# Altium PCB ControllerBoard.PcbDoc
Units mm, origin at the board's own origin, x right, y up, seen from the top; angles counter-clockwise.
Board outline 60 x 110 mm, 2 copper layers (Top Layer, Bottom Layer); 86 components, 64 nets, 332 pads, 139 vias.
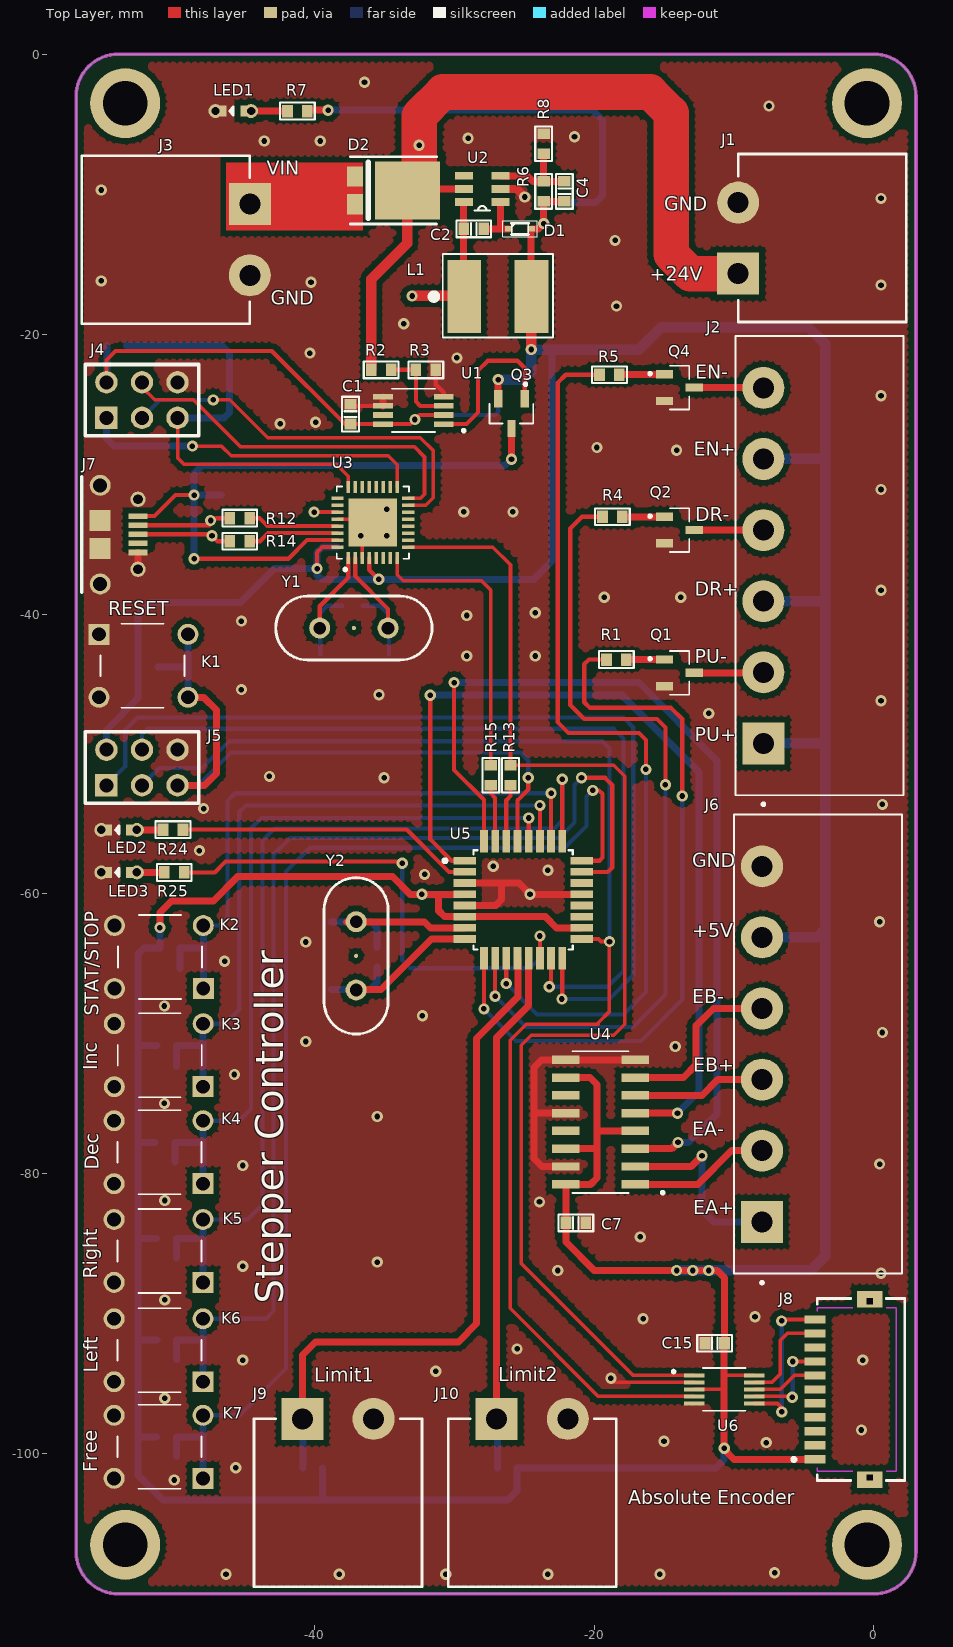
[diagram p0: Top Layer view]
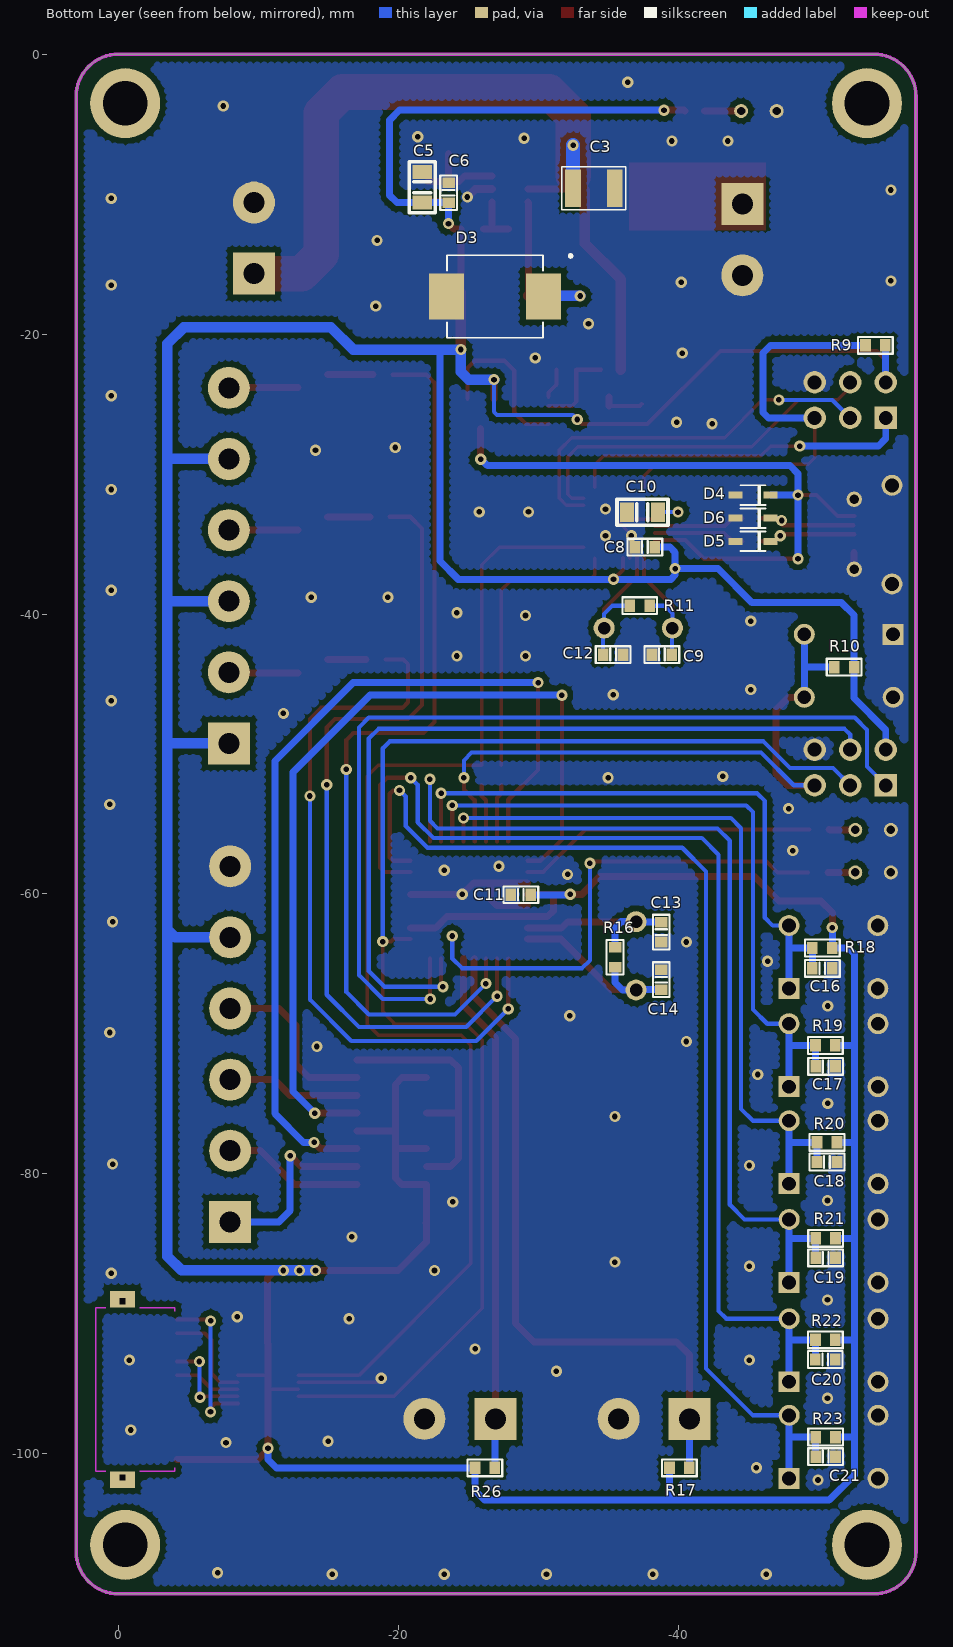
[diagram p1: Bottom Layer view, seen from below]
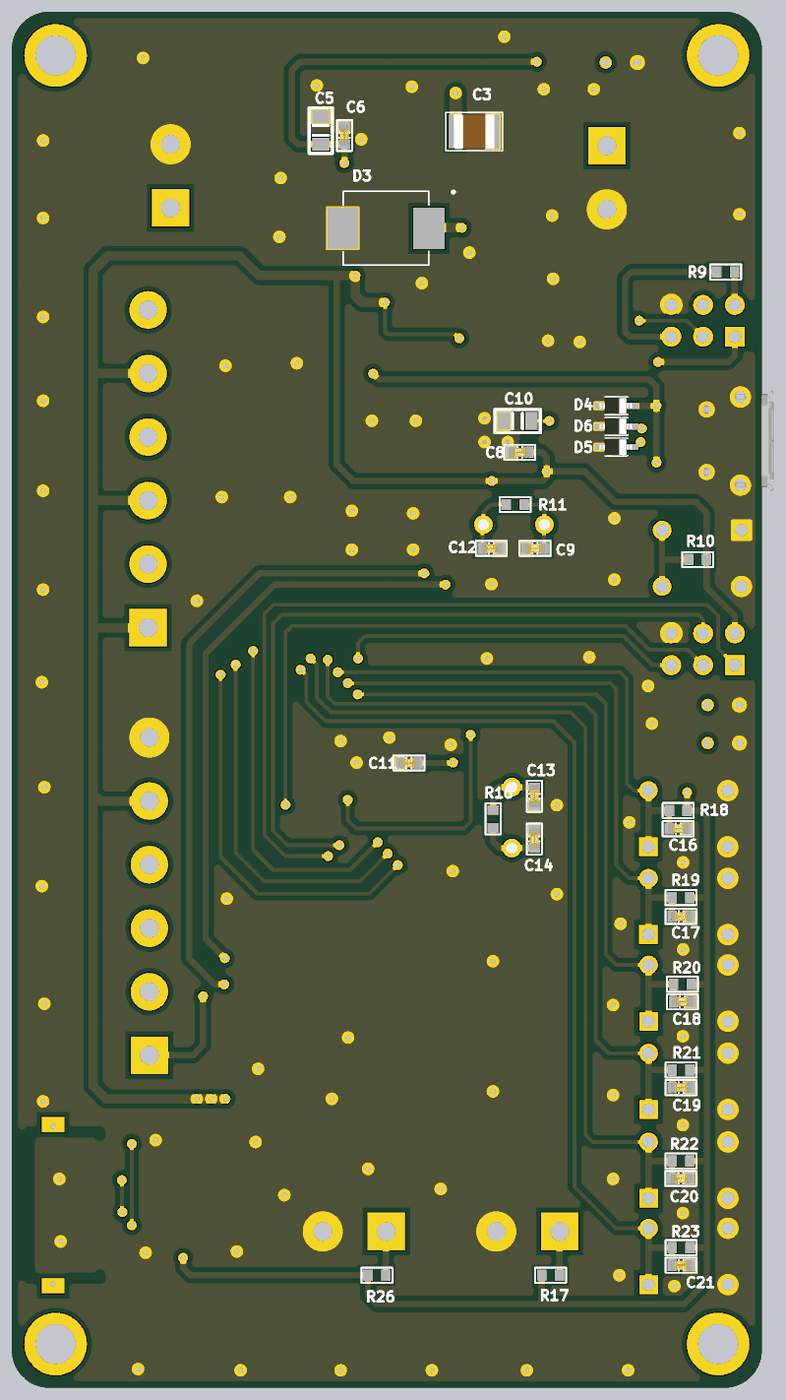
[diagram p2: 3D render of the assembled board from below, using the file's embedded part models]

## Layer stack, top to bottom
Top Solder: solder mask 0.0102, Solder Resist, Dk 3.5
Top Layer: signal copper 0.0356
Dielectric 1: dielectric 0.32, FR-4, Dk 4.8
Bottom Layer: signal copper 0.0356
Bottom Solder: solder mask 0.0102, Solder Resist, Dk 3.5

## Board outline
-57,-107 -57,-3 cw(c-54,-3) -54,0 0,0 cw(c0,-3) 3,-3 3,-107 cw(c0,-107) 0,-110 -54,-110 cw(c-54,-107)

## Design rules (kind name [scope] priority, off if disabled: settings)
Clearance [All] p1: gap=0.4 except(0.2: Arc-Arc Arc-Track Arc-SMDPad Arc-THPad Arc-Via Track-Track Track-SMDPad Track-THPad Track-Via SMDPad-SMDPad SMDPad-THPad SMDPad-Via THPad-THPad THPad-Via Via-Via; 0.35: Region-Region)
HoleSize [All] p1: absolutevalues=TRUE maxlimit=10 minlimit=0.025 maxpercent=80.000 minpercent=20.000
PolygonConnect [All] p1: connectstyle=Direct reliefconductorwidth=0.254 reliefentries=4 polygonreliefangle="90 Angle" airgapwidth=0.254
RoutingVias [All] p1: holewidth=0.3 width=0.6 viastyle="Through Hole" minholewidth=0.3 minwidth=0.6 maxholewidth=0.3 maxwidth=0.6
SolderMaskExpansion [All] p1: expansion=0.102
Width [All] p1: maxlimit=5 minlimit=0.254 preferedwidth=0.4
29 further rules are at their usual default settings.

## Components (designator, comment, footprint, x,y, rotation, side; value= is the part's Value field where it differs from the comment)
C1 "0.1uF" SMD_C(0603) -37.403,-25.714 r90 top
C2 "0.1uF" SMD_C(0603) -28.601,-12.475 r180 top
C3 "10uF" C1210 -33.989,-9.448 r0 bottom
C4 "22pF" SMD_C(0603) -22.12,-9.8 r90 top
C5 "22uF" SMD_C(0805) -21.72,-9.5 r90 bottom
C6 "0.1uF" SMD_C(0603) -23.61,-9.893 r90 bottom
C7 "0.1uF" SMD_C(0603) -21.3,-83.5 r0 top
C8 "0.1uF" SMD_C(0603) -37.634,-35.215 r0 bottom
C9 "22pF" SMD_C(0603) -38.849,-42.9 r180 bottom
C10 "1uF" SMD_C(0805) -37.46,-32.715 r0 bottom
C11 "0.1uF" SMD_C(0603) -28.77,-60.055 r0 bottom
C12 "22pF" SMD_C(0603) -35.36,-42.9 r0 bottom
C13 "22pF" SMD_C(0603) -38.8,-62.72 r90 bottom
C14 "22pF" SMD_C(0603) -38.8,-66.12 r270 bottom
C15 "0.1uF" SMD_C(0603) -11.389,-92.1 r180 top
C16 "0.1uF" SMD_C(0603) -50.311,-65.31 r180 bottom
C17 "0.1uF" SMD_C(0603) -50.541,-72.32 r180 bottom
C18 "0.1uF" SMD_C(0603) -50.641,-79.15 r180 bottom
C19 "0.1uF" SMD_C(0603) -50.541,-86 r180 bottom
C20 "0.1uF" SMD_C(0603) -50.519,-93.26 r180 bottom
C21 "0.1uF" SMD_C(0603) -50.541,-100.2 r180 bottom
D1 "1N4148" SODFL1608X70N -25.29,-12.475 r0 top
D2 "FSV8100V" TO-277 -34.34,-9.73 r0 top
D3 "B3100-13-F" DIO_B340-13-F -26.923,-17.315 r180 bottom
D4 "DF2B7AFS,L3M" SOD323 -45.36,-31.5 r0 bottom
D5 "DF2B7AFS,L3M" SOD323 -45.36,-34.8 r0 bottom
D6 "DF2B7AFS,L3M" SOD323 -45.36,-33.15 r0 bottom
J1 "CIM025P5" CON2_P5.08_CIM025P5 -9.7,-13.14 r270 top
J2 "796638-6" TE_3-796638-6 -7.9,-49.24 r90 top
J3 "CIM025P5" CON2_P5.08_CIM025P5 -44.6,-13.26 r90 top
J4 "6pin" Header-2.54m-6pin_1 -54.84,-25.98 r90 top
J5 "6pin" Header-2.54m-6pin_1 -54.84,-52.234 r90 top
J6 "796638-6" TE_3-796638-6 -8,-83.42 r90 top
J7 "10118194-0001LF" 10118194-0001LF -53.936,-34.325 r90 top
J8 "Molex 501568-1107" MOLEX_501568-1107 -4.2,-95.4 r90 top
J9 "CIM025P5" CON2_P5.08_CIM025P5 -38.295,-97.5 r180 top
J10 "CIM025P5" CON2_P5.08_CIM025P5 -24.415,-97.5 r180 top
K1 "BUTTON_DIP" "PUSH BUTTON_MINI(4 PIN)" -52.269,-43.696 r0 top
K2 "BUTTON_DIP" "PUSH BUTTON_MINI(4 PIN)" -51.021,-64.51 r180 top
K3 "BUTTON_DIP" "PUSH BUTTON_MINI(4 PIN)" -51.029,-71.52 r180 top
K4 "BUTTON_DIP" "PUSH BUTTON_MINI(4 PIN)" -51.04,-78.45 r180 top
K5 "BUTTON_DIP" "PUSH BUTTON_MINI(4 PIN)" -51.04,-85.5 r180 top
K6 "BUTTON_DIP" "PUSH BUTTON_MINI(4 PIN)" -51.04,-92.6 r180 top
K7 "BUTTON_DIP" "PUSH BUTTON_MINI(4 PIN)" -51.04,-99.5 r180 top
L1 "VLS6045EX-220M-H" VLS6045EX-220M-H_6.3*6mm -26.873,-17.315 r0 top
LED1 "RED" LED0603_1 -45.777,-4.06 r180 top
LED2 "GREEN" LED0603_1 -53.934,-55.42 r180 top
LED3 "RED" LED0603_1 -53.934,-58.46 r180 top
Q1 "MMBT2222ALT1G" SOT23-3 -13.9,-44.2 r0 top
Q2 "MMBT2222ALT1G" SOT23-3 -13.9,-34 r0 top
Q3 "FDN304PZ" SOT23-3 -25.903,-25.68 r270 top
Q4 "MMBT2222ALT1G" SOT23-3 -13.9,-23.82 r0 top
R1 "470R" SMD_R(0603) -18.4,-43.25 r0 top
R2 "20k" SMD_R(0603) -35.211,-22.55 r180 top
R3 "10k" SMD_R(0603) -32.02,-22.55 r0 top
R4 "470R" SMD_R(0603) -18.689,-33.05 r0 top
R5 "470R" SMD_R(0603) -18.9,-22.9 r0 top
R6 "52.3k" SMD_R(0603) -23.6,-9.8 r270 top
R7 "1k" SMD_R(0603) -41.196,-4.06 r180 top
R8 "10k" SMD_R(0603) -23.6,-6.4 r270 top
R9 "10k" SMD_R(0603) -54.1,-20.8 r180 bottom
R10 "10k" SMD_R(0603) -51.869,-43.796 r180 bottom
R11 "1M" SMD_R(0603) -37.26,-39.4 r180 bottom
R12 "22R" SMD_R(0603) -45.31,-33.15 r0 top
R13 "1k" SMD_R(0603) -25.97,-51.522 r270 top
R14 "22R" SMD_R(0603) -45.31,-34.8 r0 top
R15 "1k" SMD_R(0603) -27.37,-51.522 r270 top
R16 "1M" SMD_R(0603) -35.5,-64.52 r90 bottom
R17 "4.7k" SMD_R(0603) -40.1,-101 r180 bottom
R18 "4.7k" SMD_R(0603) -50.311,-63.86 r0 bottom
R19 "4.7k" SMD_R(0603) -50.53,-70.82 r0 bottom
R20 "4.7k" SMD_R(0603) -50.641,-77.75 r0 bottom
R21 "4.7k" SMD_R(0603) -50.541,-84.6 r0 bottom
R22 "4.7k" SMD_R(0603) -50.53,-91.86 r0 bottom
R23 "4.7k" SMD_R(0603) -50.541,-98.8 r0 bottom
R24 "1k" SMD_R(0603) -50.084,-55.4 r180 top
R25 "1k" SMD_R(0603) -49.996,-58.46 r180 top
R26 "4.7k" SMD_R(0603) -26.2,-101 r180 bottom
U1 "LMV358D" MSOP-8N -32.903,-25.45 r180 top
U2 "MCP16331" SOT23-6 -27.99,-9.63 r180 top
U3 "ATMEGA8U2-MU" ATMEGA8_QFN50P500X500X100-33N -35.81,-33.465 r90 top
U4 "MC3468D" SOIC-16N -19.545,-76.295 r180 top
U5 "ATMEGA328PB-AU" Atmega328_QFP80P900X900X120-32N -25.07,-60.422 r0 top
U6 "MAX1486EUB+T" MAX1486_SOP50P490X110-10N -10.7,-95.4 r0 top
Y1 "16MHz" XTAL_DIP -37.16,-41 r0 top
Y2 "16MHz" XTAL_DIP -37,-64.42 r270 top

## Footprints (in the part's own frame and the unit in brackets; to place one, negate y for a bottom-side part, rotate by r counter-clockwise, add the part's x,y. Pads: shape width x height; smd on the part's side, far side on the other; paste and mask are expansions set on the pad)
10118194-0001LF [mm] "CONN USB MICRO B RECPT SMT R/A"
  rect 0.4x1.35 smd: 1(1.325,-1.35) 2(0.675,-1.35) 3(0.025,-1.35) 4(-0.625,-1.35) 5(-1.275,-1.35)
  round 1.5 hole 1: 6(-3.525,1.35) 6(3.525,1.35)
  round 1.1 hole 0.7: 6(-2.475,-1.35) 6(2.525,-1.35)
  rect 1.5x1.5 smd: 6(-0.975,1.35) 6(1.025,1.35)
  silkscreen extent -4.1,2.68 4.13,2.68, body extent -4,-1.55 4.05,4.03, height 2.73
ATMEGA8_QFN50P500X500X100-33N [mm]
  rect 0.86x0.26 smd: 1(-2.535,1.75) 2(-2.535,1.25) 3(-2.535,0.75) 4(-2.535,0.25) 5(-2.535,-0.25) 6(-2.535,-0.75) 7(-2.535,-1.25) 8(-2.535,-1.75) 17(2.535,-1.75) 18(2.535,-1.25) 19(2.535,-0.75) 20(2.535,-0.25) 21(2.535,0.25) 22(2.535,0.75) 23(2.535,1.25) 24(2.535,1.75)
  rect 0.26x0.86 smd: 9(-1.75,-2.535) 10(-1.25,-2.535) 11(-0.75,-2.535) 12(-0.25,-2.535) 13(0.25,-2.535) 14(0.75,-2.535) 15(1.25,-2.535) 16(1.75,-2.535) 25(1.75,2.535) 26(1.25,2.535) 27(0.75,2.535) 28(0.25,2.535) 29(-0.25,2.535) 30(-0.75,2.535) 31(-1.25,2.535) 32(-1.75,2.535)
  rect 3.45x3.45 smd: 33(0,0)
  silkscreen extent -3.45,-2.58 2.58,2.58
Atmega328_QFP80P900X900X120-32N [mm]
  rect 1.6x0.55 smd: 1(-4.18,2.8) 2(-4.18,2) 3(-4.18,1.2) 4(-4.18,0.4) 5(-4.18,-0.4) 6(-4.18,-1.2) 7(-4.18,-2) 8(-4.18,-2.8) 17(4.18,-2.8) 18(4.18,-2) 19(4.18,-1.2) 20(4.18,-0.4) 21(4.18,0.4) 22(4.18,1.2) 23(4.18,2) 24(4.18,2.8)
  rect 0.55x1.6 smd: 9(-2.8,-4.18) 10(-2,-4.18) 11(-1.2,-4.18) 12(-0.4,-4.18) 13(0.4,-4.18) 14(1.2,-4.18) 15(2,-4.18) 16(2.8,-4.18) 25(2.8,4.18) 26(2,4.18) 27(1.2,4.18) 28(0.4,4.18) 29(-0.4,4.18) 30(-1.2,4.18) 31(-2,4.18) 32(-2.8,4.18)
  silkscreen extent -5.71,-3.55 3.55,3.55
C1210 [mil]
  rect 44x106 smd: 1(-59,5) 2(59,5)
  silkscreen extent -90,-55 90,65, body extent -65,-50 65,60, height 99
CON2_P5.08_CIM025P5 [mm]
  rect 3x3 hole 1.5: 1(2.54,0)
  round 3 hole 1.5: 2(-2.54,0)
  silkscreen extent -6,0 6,12
DIO_B340-13-F [mm]
  rect 2.5x3.3 smd: A(-3.45,0) C(3.45,0)
  silkscreen extent -3.42,-2.95 5.5,3
Header-2.54m-6pin_1 [mm]
  rect 1.6x1.6 hole 1: 1(0,0)
  round 1.6 hole 1: 2(2.54,0) 3(0,-2.54) 4(2.54,-2.54) 5(0,-5.08) 6(2.54,-5.08)
  silkscreen extent -1.27,-6.6 3.81,1.52
LED0603_1 [mm]
  round 1 hole 0.6: 1(-1.27,0) 2(1.27,0)
  rect 0.5x0.8 smd: 1(-0.75,0) 2(0.75,0)
  silkscreen extent 0,-0.3 0.25,0.3, body extent -0.85,-0.45 0.85,0.45, height 0.9
MAX1486_SOP50P490X110-10N [mm]
  rect 1.47x0.28 smd: 1(-2.15,1) 2(-2.15,0.5) 3(-2.15,0) 4(-2.15,-0.5) 5(-2.15,-1) 6(2.15,-1) 7(2.15,-0.5) 8(2.15,0) 9(2.15,0.5) 10(2.15,1)
  silkscreen extent -3.72,-1.53 1.53,1.53
MOLEX_501568-1107 [mm]
  rect 1.2x1.8 hole 0.4 square copper offset -0.15,0: 0(-6.3,-3.9)
  rect 1.2x1.8 hole 0.4 square copper offset 0.15,0: 0(6.3,-3.9)
  rect 0.6x1.5 smd: 1(-5,0) 2(-4,0) 3(-3,0) 4(-2,0) 5(-1,0) 6(0,0) 7(1,0) 8(2,0) 9(3,0) 10(4,0) 11(5,0)
  Keep-Out Layer lines w0.1: -5.588,-0.15 -5.85,-0.15 -5.85,-2.667 ; 5.588,-0.15 5.85,-0.15 5.85,-2.667 ; -5.85,-5.08 -5.85,-5.8 5.85,-5.8 5.85,-5.08
  silkscreen extent -6.5,-6.4 6.5,1.62
MSOP-8N [mm]
  rect 1.42x0.4 smd: 1(-2.165,0.975) 2(-2.165,0.325) 3(-2.165,-0.325) 4(-2.165,-0.975) 5(2.165,-0.975) 6(2.165,-0.325) 7(2.165,0.325) 8(2.165,0.975)
  silkscreen extent -3.69,-1.55 1.55,1.55
"PUSH BUTTON_MINI(4 PIN)" [mm]
  rect 1.498x1.498 hole 0.99: 1(-3.1,2.25)
  round 1.498 hole 0.99: 1(-3.1,-2.25) 2(3.25,-2.25) 2(3.25,2.25)
  silkscreen extent -3,-3 3,3
SMD_C(0603) [mil]
  rect 30x35 smd mask+2: 1(-28,0) 2(28,0)
  silkscreen extent -49,-24 49,24, body extent -31,-16 32,16, height 31
SMD_C(0805) [mm]
  rect 1x1.4 smd: 1(-1.1,0) 2(1.1,0)
  silkscreen extent -1.82,-0.92 1.82,0.94, body extent -1.38,-0.58 1.32,0.61, height 0.6
SMD_R(0603) [mil]
  rect 30x35 smd mask+2: 1(-28,0) 2(28,0)
  silkscreen extent -49,-24 49,24, body extent -35,-14 35,13, height 24
SOD323 [mm]
  rect 1x0.5 smd: 1(-1.25,0) 2(1.25,0)
  silkscreen extent -0.9,-0.7 0.9,0.7, body extent -1.25,-0.68 1.35,0.67, height 1.1
SODFL1608X70N [mm]
  rect 0.54x0.42 smd: 1(-0.8,0) 2(0.8,0)
  silkscreen extent -1.22,-0.58 1.22,0.58, body extent -0.8,-0.4 0.8,0.4, height 0.7
SOIC-16N [mm]
  rect 1.97x0.6 smd: 1(-2.475,4.445) 2(-2.475,3.175) 3(-2.475,1.905) 4(-2.475,0.635) 5(-2.475,-0.635) 6(-2.475,-1.905) 7(-2.475,-3.175) 8(-2.475,-4.445) 9(2.475,-4.445) 10(2.475,-3.175) 11(2.475,-1.905) 12(2.475,-0.635) 13(2.475,0.635) 14(2.475,1.905) 15(2.475,3.175) 16(2.475,4.445)
  silkscreen extent -4.54,-5.06 2,5.14
SOT23-3 [mm]
  rect 1.23x0.59 smd: 1(-1.06,0.95) 2(-1.06,-0.95) 3(1.06,0)
  silkscreen extent -2.2,-1.56 0.7,1.56
SOT23-6 [mil]
  rect 50x22 smd: 1(-51,37) 2(-51,0) 3(-51,-37) 4(51,-37) 5(51,0) 6(51,37)
  silkscreen extent -21,48 21,60
TE_3-796638-6 [mm]
  rect 3x3 hole 1.5: 1(0,0)
  round 3 hole 1.5: 2(5.08,0) 3(10.16,0) 4(15.24,0) 5(20.32,0) 6(25.4,0)
  silkscreen extent -4.45,-10 29.1,2
TO-277 [mm]
  rect 1.15x1.45 smd: 1(-2.75,-0.985) 1(-2.75,0.985)
  rect 4.65x4.15 smd: 2(1,0)
  silkscreen extent -3.07,-2.4 3.08,2.4, body extent -3.35,-2.38 3.3,2.37, height 1.2
VLS6045EX-220M-H_6.3*6mm [mm]
  rect 2.4x5.2 smd: 1(-2.4,0) 2(2.4,0)
  silkscreen extent -4.77,-2.92 3.94,3.05
XTAL_DIP [mm]
  round 1.5 hole 0.9: 1(-2.44,0) 2(2.44,0)
  round 0.3 smd: ""(0,0)
  silkscreen extent -5.59,-2.29 5.59,2.29, body extent -5.68,-2.29 5.68,2.36, height 3.5

## Part data
C1 C2 C4 C5 C6 C7 C8 C10 C11 C15: library part Cap, "CAP CER 0.1UF 50V X7R 0603"
C3: library part Cap, "CAP CER 2.2UF 100V X7R 1210"
C9 C12 C13 C14: library part Cap, "CAP CER 27PF 50V C0G/NP0 0603"
C16 C17 C18 C19 C20 C21: library part Cap, "Capacitor"
D1: library part Diode, "Diode"
D2: library part PDS760Q-13, "DIODE SCHOTTKY 100V 8A TO-277"
D3: library part "Diode 10TQ035", "Schottky Rectifier"
D4 D5 D6: "BIDIRECTIONAL ESD DIODE VRWM=+/-"
J1 J3: library part "Header 2", "TERM BLK 2P SIDE ENT 5.08MM PCB"
J2 J6: library part 6PinConnector, "3PinConnector"
J4 J5: library part 6PinConnector_1
J7: "CONN RCPT USB2.0 MICRO B SMD R/A"
J8: library part "11Pin Connector", "3PinConnector"
J9 J10: library part "End Stop Switch", "End Stop Switch"
K1 K2 K3 K4 K5 K6 K7: library part SW-PB, "2 Pin Mini Push Button Switch"
L1: library part Inductor, "Inductor"
LED1 LED2: library part LED_0402, "LED YELLOW CLEAR CHIP SMD"
LED3: library part LED_0402, "LED RED CLEAR 2SMD"
Q1 Q2 Q4: library part NPN, "NPN Bipolar Transistor"
Q3: library part MOSFET-P, "P-Channel MOSFET"
R1 R2 R3 R4 R5 R6 R7 R8 R9 R10 R11 R13 R15 R16 R24 R25: library part R_0402, "RES SMD 470 OHM 1% 1/10W 0603"
R12 R14: library part R_0402, "RES SMD 0 OHM JUMPER 1/10W 0603"
R17 R18 R19 R20 R21 R22 R23 R26: library part Res2, "Resistor"
U1: library part "Op Amp", "Linear Operational Amplifier"
U2: "Step down Converter Chip"
U3: "AVR AVR® ATmega Microcontroller IC 8-Bit 16MHz 8KB _4K x 16_ FLASH 32-VQFN _5x5_"
U4: "Line Receiver"
U5: "AVR AVR® ATmega Microcontroller IC 8-Bit 20MHz 32KB _16K x 16_ FLASH 32-TQFP _7x7_"
U6: "Single Transmitter/Receiver RS-422/RS-485 10-Pin uMAX"
Y1 Y2: library part XTAL, "CRYSTAL 12.0000MHZ 18PF T/H"

## Free pads (board coordinates)
  round 5 hole 3.2: 0(-53.5,-3.5) 0(-53.5,-106.5) 0(-0.5,-106.5) 0(-0.5,-3.5)

## Via types
v1: diameter 0.8, hole 0.4, Top Layer to Bottom Layer, 139 vias

## Nets (pads, with @x,y where several pads share a name; then routed paths per layer and width w, separated by ;. In a path a pad name is that pad's centre, name@x,y a point inside that pad or via, vN(x,y) a via of type N, cw(c..) or ccw(c..) an arc to the next point about the centre after c; other vN are vias at no path point)
+5V: C1.1 C4.1 C5.1 C6.1 C7.1 C8.1 C11.1 C15.1 D1.2 J2.1 J2.3 J2.5 J4.2 J5.2 J6.5 J8.1 L1.2 Q3.2 R6.2 R7.1 R9.2 R10.2 R17.1 R18.1 R19.1 R20.1 R21.1 R22.1 R23.1 R26.1 U1.2 U1.8 U3.4 U3.32 U4.4 U4.10 U4.14 U4.16 U5.4 U5.6 U5.18 U6.3 U6.10 | length 462.6
  Top Layer w0.254: U6.3 -10.7,-95.4 ; -10.7,-94.4 U6.10
  Top Layer w0.3: J4.2 -54.84,-21.84 -54.2,-21.2 -43.025,-21.2 -37.8,-26.425 C1.1 U1.8 -33.125,-26.425 v1(-32.8,-26.1) -32.475,-25.775 U1.2 ; v1(-39.786,-36.749) -39.786,-35.586 -39.415,-35.215 U3.32 ; U3.4 -36.06,-36.841 v1(-35.386,-37.515)
  Top Layer w0.5: v1(-51.022,-62.4) -51.022,-61.325 -50.198,-60.5 -47.2,-60.5 -45.46,-58.76 -34.4,-58.76 -33.138,-60.022 v1(-32.3,-60.022) -31.1,-60.022 ; R7.1 -40.424,-4 v1(-39,-4) ; U5.4 -31.1,-60.022 ; Q3.2 v1(-26.853,-23.247) ; L1.2@-24.49,-17 D1.2 ; D1.2 -23.975,-12.475 v1(-23.6,-12.1) R6.2 C4.1 ; U4.14 -19.8,-78.2 ; U4.10 -20.28,-73.12 -19.8,-73.6 -19.8,-76.93 ; C7.1 -22.011,-84.879 -19.99,-86.9 v1(-14.1,-86.9) v1(-12.955,-86.9) v1(-11.8,-86.9) -11.2,-86.9 -10.678,-87.422 C15.1 -10.7,-92.122 -10.7,-94.4 -10.7,-95.4 v1(-10.7,-99.6) -10.7,-99.7 -10,-100.4 J8.1 ; C7.1@-21.981,-83.5 -22.02,-83.461 U4.16 -20.24,-80.74 -19.8,-80.3 -19.8,-78.2 ; U5.18 -22.688,-62.422 -23.488,-61.622 U5.6 -30.678,-61.622 -31.1,-61.2 -31.1,-60.022 ; U4.4 -19.8,-76.93 ; -19.8,-78.2 -19.8,-76.93
  Top Layer w0.75: L1.2@-24.49,-17 -24.488,-17.002 v1(-24.488,-21.1)
  Bottom Layer w0.3: v1(-32.8,-26.1) -32.475,-25.775 -27.075,-25.775 -26.853,-25.553 v1(-26.853,-23.247)
  Bottom Layer w0.5: J5.2 -54.84,-48.271 -52.58,-46.011 R10.2 -52.58,-40.08 -51.69,-39.19 -45.29,-39.19 -42.849,-36.749 v1(-39.786,-36.749) ; J4.2 -54.811,-23.411 R9.2 ; R20.1 -52.55,-77.75 -52.6,-77.7 ; R23.1 -52.6,-98.8 ; R21.1 -52.6,-84.6 ; R22.1 -52.59,-91.86 -52.6,-91.85 ; R19.1 -52.58,-70.82 -52.6,-70.8 ; v1(-51.022,-62.4) R18.1 -52.16,-63.86 -52.6,-64.3 -52.6,-70.8 ; R17.1 -39.389,-103.3 ; v1@-39.1,-4 v1(-39,-4) -20.1,-4 -19.4,-4.7 -19.4,-10.089 -19.911,-10.6 C5.1 -21.725,-10.604 C6.1 -23.61,-12.09 v1(-23.6,-12.1) ; C8.1 -39.415,-35.215 -39.786,-35.586 v1(-39.786,-36.749) ; v1(-32.3,-60.022) -32.267,-60.055 C11.1 ; -22.744,-21.1 -23,-21.356 -23,-36.221 -24.294,-37.515 v1(-35.386,-37.515) -39.485,-37.515 -39.786,-37.214 v1(-39.786,-36.749) ; v1@-10.7,-99.7 -10.7,-100.4 -11.3,-101 R26.1 -25.489,-102.619 -26.17,-103.3 -39.389,-103.3 ; -52.6,-98.8 -52.6,-101.5 -50.8,-103.3 -39.389,-103.3 ; -52.6,-98.8 -52.6,-91.85 ; -52.6,-91.85 -52.6,-84.6 ; -52.6,-84.6 -52.6,-77.7 ; -52.6,-77.7 -52.6,-70.8
  Bottom Layer w0.75: v1(-26.853,-23.247) -25.047,-23.247 -24.488,-22.688 v1(-24.488,-21.1) -22.744,-21.1 -16.8,-21.1 -15.2,-19.5 -4.7,-19.5 -3.5,-20.7 -3.5,-28.92 ; v1(-14.1,-86.9) v1(-12.955,-86.9) v1(-11.8,-86.9) -4.53,-86.9 -3.5,-85.87 -3.5,-62.54 ; J6.5 -4.06,-63.1 -3.5,-62.54 ; J2.1 -3.66,-49.24 -3.5,-49.4 ; J2.3 -3.52,-39.08 -3.5,-39.1 ; J2.5 -3.5,-28.92 ; -3.5,-62.54 -3.5,-49.4 ; -3.5,-49.4 -3.5,-39.1 ; -3.5,-39.1 -3.5,-28.92
AREF: U5.20
"DECREASE SPEED": C18.1 K4.1 R20.2 U5.28 | length 53.6
  Top Layer w0.3: U5.28 v1(-24.67,-54.57)
  Bottom Layer w0.3: K4.1@-47.94,-76.2 -45.35,-76.2 -44.507,-75.357 -44.507,-55.307 -43.77,-54.57 v1(-24.67,-54.57)
  Bottom Layer w0.5: C18.1 R20.2 -47.99,-77.75 -47.94,-77.7 ; K4.1@-47.94,-80.7 -47.94,-77.7 ; K4.1@-47.94,-76.2 -47.94,-77.7
DR: R4.1 U5.10 | length 58.6
  Top Layer w0.3: v1(-27.07,-67.3) U5.10 ; R4.1 -20.87,-33.05 -21.7,-33.88 -21.7,-46.5 -20.7,-47.5 -15.5,-47.5 -14.9,-48.1 v1(-14.9,-52.2)
  Bottom Layer w0.3: v1(-27.07,-67.3) -24.87,-69.5 -17.2,-69.5 -14.9,-67.2 v1(-14.9,-52.2)
DR-: J2.4 Q2.3 | length 4.9
  Top Layer w0.5: Q2.3 J2.4
ENA: R5.1 U5.11 | length 65.6
  Top Layer w0.3: v1(-26.27,-66.4) U5.11 ; R5.1 -22.02,-22.9 -22.6,-23.48 -22.6,-47.719 -21.819,-48.5 -16.8,-48.5 -16.3,-49 v1(-16.3,-51.1)
  Bottom Layer w0.3: v1(-26.27,-66.4) -24.07,-68.6 -17.9,-68.6 -16.3,-67 v1(-16.3,-51.1)
ENA-: J2.6 Q4.3 | length 4.9
  Top Layer w0.5: Q4.3 -7.92,-23.82 J2.6
ENCODER_EA: U4.3 U5.32 | length 65.5
  Top Layer w0.3: v1(-30,-44.9) -30,-51.14 -27.87,-53.27 U5.32
  Top Layer w0.5: U4.3 -14.45,-78.2 v1(-14,-77.75)
  Bottom Layer w0.5: v1(-30,-44.9) -16.794,-44.9 -11.2,-50.494 -11.2,-75.7 -13.25,-77.75 v1(-14,-77.75)
ENCODER_EA+: J6.1 U4.2 | length 13.6
  Top Layer w0.5: U4.2 -13.06,-79.47 v1(-12.29,-78.7)
  Bottom Layer w0.5: v1(-12.29,-78.7) -12.29,-82.61 -11.48,-83.42 J6.1
ENCODER_EA-: J6.2 U4.1 | length 10.1
  Top Layer w0.5: U4.1 -12.57,-80.74 -10.17,-78.34 J6.2
ENCODER_EB: U4.5 U5.1 | length 62.9
  Top Layer w0.3: v1(-31.7,-45.8) -31.7,-56.1 -30.178,-57.622 U5.1
  Top Layer w0.5: U4.5 v1(-14.04,-75.66)
  Bottom Layer w0.5: v1(-31.7,-45.8) -18,-45.8 -12.5,-51.3 -12.5,-74.12 v1(-14.04,-75.66)
ENCODER_EB+: J6.3 U4.6 | length 9.5
  Top Layer w0.5: U4.6 -12.29,-74.39 -11.16,-73.26 J6.3
ENCODER_EB-: J6.4 U4.7 | length 12.8
  Top Layer w0.5: U4.7 -13.62,-73.12 -12.7,-72.2 -12.7,-69.4 -11.48,-68.18 J6.4
"FREE MOVE": C21.1 K7.1 R23.2 U5.24 | length 83.1
  Top Layer w0.3: U5.24 -19.622,-57.622 -19.4,-57.4 -19.4,-52.84 -19.64,-52.6 v1(-20.1,-52.6)
  Bottom Layer w0.3: K7.1@-47.94,-97.25 -45.35,-97.25 -42,-93.9 -42,-58.4 -40.3,-56.7 -22.1,-56.7 -20.545,-55.145 -20.545,-53.045 v1(-20.1,-52.6)
  Bottom Layer w0.5: C21.1 R23.2 -47.99,-98.8 -47.94,-98.75 ; K7.1@-47.94,-101.75 -47.94,-98.75 ; K7.1@-47.94,-97.25 -47.94,-98.75
GND: C1.2 C3.1 C5.2 C6.2 C7.2 C8.2 C9.1 C10.2 C11.2 C12.1 C13.1 C14.1 C15.2 C16.2 C17.2 C18.2 C19.2 C20.2 C21.2 D3.A D4.2 D5.2 D6.2 J1.2 J3.2 J4.6 J5.6 J6.6 J7.5 J7.6 J8.3 J9.2 J10.2 K1.1 K2.2 K3.2 K4.2 K5.2 K6.2 K7.2 LED1.2 LED2.2 LED3.2 Q1.2 Q2.2 Q4.2 R3.2 R8.1 U1.4 U1.5 U1.6 U2.2 U3.3 U3.28 U3.33 U4.8 U4.9 U4.12 U4.15 U5.3 U5.5 U5.21 U6.2 U6.5 | length 51.4
  Top Layer w0.254: U3.28 -36.06,-33.215 U3.33 -36.56,-34.215 U3.3 ; v1(-18.8,-94.6) -18.5,-94.9 U6.2
  Top Layer w0.3: C1.2 -37.28,-25.125 U1.6 ; R3.2 -31.309,-23.612 -30.738,-24.183 U1.4
  Top Layer w0.5: J7.6@-52.586,-36.8 J7.5 ; U1.6 U1.5 ; U5.5 -27.022,-60.822 -26.6,-60.4 -26.6,-59.222 ; U5.3 -26.6,-59.222 ; U4.15 -23.73,-79.47 -24.3,-78.9 -24.3,-75.6 ; U4.12 -24.24,-75.66 -24.3,-75.6 ; U5.21 v1(-24.578,-60.022) -25.378,-59.222 -26.6,-59.222 ; U4.8 U4.9 -23.75,-71.85 -24.3,-72.4 -24.3,-75.6
  Top Layer w0.6: U2.2 -25.523,-9.63 v1(-24.953,-10.2)
  other v1: -46.3,-108.6 -38.2,-108.6 -30.6,-108.6 -23.3,-108.6 -15.3,-108.6 -7.1,-108.5 -50,-101.871 -45.6,-101 -7.7,-99.2 -15,-99.1 -0.9,-98.3 -50.678,-96.03 -31.309,-94.1 -45.1,-93.3 -0.8,-93.3 -25.5,-92.5 -16.5,-90.35 -8.5,-90.2 -50.678,-89 0.5,-87.1 -22.6,-86.9 -45.1,-86.6 -35.487,-86.3 -16.7,-84.5 -23.9,-82 -50.678,-81.9 -45.1,-79.4 0.4,-79.3 -35.487,-75.9 -50.7,-74.96 -45.7,-72.9 -14.2,-70.9 -40.6,-70.541 0.6,-69.9 -32.267,-68.7 -50.7,-68 -46.4,-64.8 -40.6,-63.429 0.4,-61.989 -32.111,-58.6 -23.3,-58.3 -27.2,-58.02 -48.2,-56.9 -47.9,-53.9 0.6,-53.6 -35,-51.7 -43.2,-51.6 -11.8,-47.1 0.5,-46.2 -35.364,-45.76 -45.2,-45.4 -29.1,-43 -24.2,-43 -45.2,-40.5 -29.1,-40.1 -24.2,-39.9 -19.27,-38.8 -13.8,-38.8 0.5,-38.3 -36.668,-34.4 -34.814,-34.4 -29.318,-32.7 -25.8,-32.7 -34.814,-32.5 0.5,-31.1 -14.1,-28.3 -19.8,-28.1 -42.434,-26.4 -39.894,-26.3 0.5,-24.4 -29.8,-21.7 -40.3,-21.356 -33.6,-19.26 -18.4,-18 0.5,-16.5 -40.226,-16.3 -55.204,-16.2 -18.5,-13.3 0.5,-10.3 -55.204,-9.7 -43.56,-6.2 -39.56,-6.2 -29,-6 -21.4,-5.9 -7.5,-3.7 -36.4,-2
"INCREASE SPEED": C17.1 K3.1 R19.2 U5.27 | length 49.3
  Top Layer w0.3: U5.27 v1(-23.87,-53.67)
  Bottom Layer w0.3: K3.1@-47.929,-69.27 -46.37,-69.27 -45.35,-68.25 -45.35,-54.15 -44.87,-53.67 v1(-23.87,-53.67)
  Bottom Layer w0.5: C17.1 -49.819,-72.309 R19.2 -47.979,-70.82 -47.929,-70.77 ; K3.1@-47.929,-73.77 -47.929,-70.77 ; K3.1@-47.929,-69.27 -47.929,-70.77
"JOG LEFT": C20.1 K6.1 R22.2 U5.23 | length 82.1
  Top Layer w0.3: v1(-20.9,-51.7) -19.206,-51.7 -18.7,-52.206 -18.7,-58.1 -19.022,-58.422 U5.23
  Bottom Layer w0.3: K6.1@-47.94,-90.35 -43.45,-90.35 -42.9,-89.8 -42.9,-57.2 -41.7,-56 -22.519,-56 -21.4,-54.881 -21.4,-52.2 v1(-20.9,-51.7)
  Bottom Layer w0.5: C20.1 -49.819,-93.249 R22.2 -47.95,-91.86 -47.94,-91.85 ; K6.1@-47.94,-94.85 -47.94,-91.85 ; K6.1@-47.94,-90.35 -47.94,-91.85
"JOG RIGHT": C19.1 K5.1 R21.2 U5.25 | length 68
  Top Layer w0.3: U5.25 v1(-22.27,-51.8)
  Bottom Layer w0.3: K5.1@-47.94,-83.25 -44.75,-83.25 -43.7,-82.2 -43.7,-56.2 -42.82,-55.32 -22.82,-55.32 -22.27,-54.77 v1(-22.27,-51.8)
  Bottom Layer w0.5: C19.1 R21.2 -48.09,-84.6 -47.94,-84.75 ; K5.1@-47.94,-87.75 -47.94,-84.75 ; K5.1@-47.94,-83.25 -47.94,-84.75
LED1: R24.1 U5.2 | length 21.4
  Top Layer w0.3: R24.1 -33.386,-55.4 -30.364,-58.422 U5.2
LED2: R25.1 U5.14 | length 36.4
  Top Layer w0.3: R25.1 -47.1,-58.46 -46.328,-57.688 v1@-33.7,-57.688 ; U5.14 v1(-23.87,-63)
  Bottom Layer w0.3: v1(-33.7,-57.8) -33.7,-64.74 -33.14,-65.3 -24.57,-65.3 -23.87,-64.6 v1(-23.87,-63)
"LIMIT SWITCH1": J9.1 R17.2 U5.12 | length 48.8
  Top Layer w0.5: J9.1 -40.835,-92.935 -39.9,-92 -29.7,-92 -28.4,-90.7 -28.4,-70.311 -25.42,-67.331 -25.42,-64.652 U5.12
  Bottom Layer w0.5: J9.1 -40.811,-97.524 R17.2
"LIMIT SWITCH2": J10.1 R26.2 U5.13 | length 37.4
  Top Layer w0.5: J10.1 -26.955,-70.255 -24.67,-67.97 U5.13
  Bottom Layer w0.5: J10.1 -26.911,-97.5 R26.2
M8RXD/SSI_DATA: R13.1 U3.9 U6.1 | length 87.6
  Top Layer w0.254: U3.9 -27.239,-35.215 -25.97,-36.484 R13.1 -18.589,-50.811 -17.8,-51.6 -17.8,-69.3 -18.6,-70.1 -24.5,-70.1 -25.2,-70.8 -25.2,-86.403 -17.203,-94.4 U6.1
M8TXD: R15.1 U3.8 | length 20.9
  Top Layer w0.254: U3.8 -34.06,-37.185 -33.63,-37.615 -28.039,-37.615 -27.37,-38.284 R15.1
MISO: J5.1 U5.16 | length 67.9
  Top Layer w0.3: v1(-22.3,-67.5) -22.27,-67.47 U5.16
  Bottom Layer w0.3: J5.1 -53.5,-50.894 -53.5,-48.271 -52.629,-47.4 -17.9,-47.4 -17.2,-48.1 -17.2,-65.8 -18.9,-67.5 v1(-22.3,-67.5)
MISO2: J4.1 U3.17 | length 24.6
  Top Layer w0.254: v1(-48.7,-28) -46.615,-28 -45.915,-28.7 -34.7,-28.7 -34.06,-29.34 U3.17
  Bottom Layer w0.5: J4.1 -54.84,-27.471 -54.311,-28 v1(-48.7,-28)
MOSI: J5.4 U5.15 | length 60.4
  Top Layer w0.3: v1(-23.2,-66.627) -23.07,-66.497 U5.15
  Bottom Layer w0.3: J5.4 -52.3,-48.6 -51.9,-48.2 -18.6,-48.2 -17.9,-48.9 -17.9,-65.5 -19.027,-66.627 v1(-23.2,-66.627)
MOSI2: J4.4 U3.16 | length 26.5
  Top Layer w0.254: J4.4 -52.3,-23.8 -51.4,-24.7 -48.62,-24.7 -45.265,-28.055 -32.835,-28.055 -32.114,-28.776 -32.114,-31.429 -32.4,-31.715 U3.16
NetC2_1: C2.1 D1.1 U2.1 | length 3.7
  Top Layer w0.5: C2.1 -26.7,-12.475 ; U2.1 -26.695,-12.47 -26.7,-12.475 ; D1.1 -26.7,-12.475
NetC2_2: C2.2 D3.C L1.1 U2.6 | length 13
  Top Layer w0.5: L1.1@-29.312,-17.276 C2.2 -29.312,-10.597 U2.6
  Top Layer w0.75: v1(-33,-17.276) L1.1@-29.312,-17.276
  Bottom Layer w0.5: D3.C@-30.412,-17.276 D3.C
  Bottom Layer w0.75: v1(-33,-17.276) D3.C@-30.412,-17.276
NetC4_2: C4.2 R6.1 R8.2 U2.3 | length 6.7
  Top Layer w0.5: U2.3 -24.755,-8.69 -24.356,-9.089 R6.1 ; R8.2 R6.1 ; C4.2 R6.1
NetC9_2: C9.2 R11.2 U3.1 Y1.1 | length 10.7
  Top Layer w0.3: Y1.1 -39.6,-39.44 -37.56,-37.4 U3.1
  Bottom Layer w0.3: C9.2 -39.56,-41.04 Y1.1 -39.6,-39.954 -39.046,-39.4 R11.2
NetC10_1: C10.1 U3.27 | length 3.1
  Top Layer w0.3: v1(-40,-32.715) U3.27
  Bottom Layer w0.3: v1(-40,-32.715) C10.1
NetC12_2: C12.2 R11.1 U3.2 Y1.2 | length 11
  Top Layer w0.3: U3.2 -37.06,-37.291 -34.72,-39.631 Y1.2
  Bottom Layer w0.3: R11.1 -35.326,-39.4 -34.72,-40.006 Y1.2 -34.649,-41.071 C12.2
NetC13_2: C13.2 R16.2 U5.7 Y2.1 | length 13.5
  Top Layer w0.5: Y2.1@-37.679,-61.989 -32.111,-61.989 -31.678,-62.422 U5.7
  Bottom Layer w0.5: C13.2 -37.029,-62.009 Y2.1 -35.94,-61.98 -35.5,-62.42 R16.2
NetC14_2: C14.2 R16.1 U5.8 Y2.2 | length 13.9
  Top Layer w0.5: Y2.2@-37.029,-66.831 -35.211,-66.831 ; -35.211,-66.811 -31.622,-63.222 U5.8
  Bottom Layer w0.5: C14.2 -37.029,-66.831 Y2.2 -36.04,-66.86 -35.5,-66.32 R16.1
NetD2_1: D2.1 J3.1
NetD5_1: D5.1 J7.3 R14.1 | length 7.6
  Top Layer w0.3: J7.3 -47.4,-34.3 v1(-47.3,-34.4) -46.9,-34.8 R14.1
  Bottom Layer w0.3: v1(-47.3,-34.4) -46.9,-34.8 D5.1
NetD6_1: D6.1 J7.2 R12.1 | length 6.9
  Top Layer w0.3: J7.2@-52.521,-33.65 v1@-47.483,-33.65 ; -46.983,-33.15 R12.1
  Bottom Layer w0.3: v1(-47.4,-33.315) -47.235,-33.15 D6.1
NetLED1_1: LED1.1 R7.2 | length 2.6
  Top Layer w0.5: LED1.1@-44.507,-4.06 R7.2
NetLED2_1: LED2.1 R24.2 | length 1.9
  Top Layer w0.5: LED2.1@-52.664,-55.42 -50.816,-55.42 R24.2
NetLED3_1: LED3.1 R25.2 | length 2
  Top Layer w0.5: LED3.1@-52.664,-58.46 R25.2
NetQ1_1: Q1.1 R1.2 | length 2.7
  Top Layer w0.5: R1.2 Q1.1
NetQ2_1: Q2.1 R4.2 | length 3
  Top Layer w0.5: R4.2 Q2.1
NetQ3_1: Q3.1 U1.1 | length 11.8
  Top Layer w0.3: U1.1 -29.125,-26.425 -28.3,-25.6 -28.3,-22.61 -27.59,-21.9 -25.483,-21.9 -24.953,-22.43 Q3.1
NetQ4_1: Q4.1 R5.2 | length 3.2
  Top Layer w0.5: R5.2 -14.99,-22.9 Q4.1
NetR2_1: R2.1 R3.1 U1.3 | length 6.1
  Top Layer w0.3: R2.1 R3.1 ; R3.1@-32.731,-22.56 -32.731,-24.812 -32.418,-25.125 U1.3
NetR12_2: R12.2 U3.29 | length 6.5
  Top Layer w0.3: R12.2 -43.91,-33.15 -43.345,-33.715 U3.29
NetR13_2: R13.2 U5.30 | length 4.1
  Top Layer w0.3: U5.30 -26.27,-53.3 -25.97,-53 R13.2
NetR14_2: R14.2 U3.30 | length 6.5
  Top Layer w0.3: R14.2 -43.871,-34.8 -43.286,-34.215 U3.30
NetR15_2: R15.2 U5.31 | length 4.1
  Top Layer w0.3: R15.2 -27.37,-52.83 -27.07,-53.13 U5.31
PU-: J2.2 Q1.3 | length 5
  Top Layer w0.5: Q1.3 -7.94,-44.2 J2.2
PU_PWM: R1.1 U5.9 | length 51.9
  Top Layer w0.3: v1(-27.87,-68.211) U5.9 ; R1.1 -20.37,-43.25 -20.7,-43.58 -20.7,-46.3 -20.3,-46.7 -14.5,-46.7 -13.7,-47.5 v1(-13.7,-53)
  Bottom Layer w0.3: v1(-27.87,-68.211) -25.581,-70.5 -16.649,-70.5 -13.7,-67.551 v1(-13.7,-53)
RESET: J5.5 K1.2 R10.1 U5.29 | length 49.1
  Top Layer w0.3: U5.29 -25.47,-53.31 -24.7,-52.54 v1(-24.7,-51.7)
  Top Layer w0.5: J5.5 -47.834,-52.234 -46.983,-51.383 -46.983,-46.858 -47.894,-45.946 K1.2@-49.019,-45.946
  Bottom Layer w0.3: J5.5 -48.266,-52.234 -45.933,-49.9 -25.253,-49.9 -24.7,-50.453 v1(-24.7,-51.7)
  Bottom Layer w0.5: R10.1 -49.023,-43.796 -49.019,-43.8 ; K1.2@-49.019,-45.946 -49.019,-43.8 ; K1.2@-49.019,-41.446 -49.019,-43.8
RESET2: J4.5 R9.1 U3.24 | length 32.1
  Top Layer w0.254: J4.5 -49.76,-28.84 -49.299,-29.301 -38.401,-29.301 -37.56,-30.143 U3.24
  Bottom Layer w0.5: R9.1 -46.6,-20.8 -46.06,-21.34 -46.06,-25.591 -46.449,-25.98 J4.5
SCK2: J4.3 U3.15 | length 28.2
  Top Layer w0.254: v1(-47.207,-24.7) -46.025,-24.7 -43.325,-27.4 -32.415,-27.4 -31.5,-28.315 -31.5,-31.695 -32.02,-32.215 U3.15
  Bottom Layer w0.3: J4.3 -51.02,-24.7 v1(-47.207,-24.7)
SCK/SSI_CLK: J5.3 U5.17 U6.4 | length 98.7
  Top Layer w0.254: v1(-18.9,-63.4) -18.9,-68.4 -19.7,-69.2 -19.7,-69.3 -24.855,-69.3 -26,-70.445 -26,-89.6 -19.7,-95.9 U6.4
  Top Layer w0.3: U5.17 -19.678,-63.222 -19.5,-63.4 v1(-18.9,-63.4)
  Bottom Layer w0.3: J5.3 -51.066,-51 -48,-51 -46.094,-49.094 -19.4,-49.094 -18.9,-49.594 v1(-18.9,-63.4)
SSI_CLOCK+: J8.7 U6.8 | length 4.8
  Top Layer w0.254: U6.8 -6.7,-95.4 -5.7,-94.4 J8.7
SSI_CLOCK-: J8.8 U6.7 | length 6.8
  Top Layer w0.254: U6.7 -6,-95.9 v1@-5.945,-95.955
  Top Layer w0.3: v1(-5.8,-93.4) J8.8
  Bottom Layer w0.3: v1(-5.845,-95.955) -5.8,-95.91 v1(-5.8,-93.4)
SSI_DATA+: J8.10 U6.9 | length 7.2
  Top Layer w0.254: U6.9 -7.3,-94.9 -6.7,-94.3 -6.7,-91.9 -6.2,-91.4 J8.10
SSI_DATA-: J8.11 U6.6 | length 11.2
  Top Layer w0.3: U6.6 -6.9,-96.4 -6.595,-96.705 v1(-6.595,-97.005) ; v1@-6.5,-90.4 J8.11
  Bottom Layer w0.3: v1(-6.595,-97.005) v1@-6.595,-90.5
  other v1: -6.6,-90.5
START/STOP: C16.1 K2.1 R18.2 U5.26 | length 44.8
  Top Layer w0.3: U5.26 v1(-23.07,-52.8)
  Bottom Layer w0.3: K2.1@-47.921,-62.26 -46.76,-62.26 -46.2,-61.7 -46.2,-53.365 -45.635,-52.8 v1(-23.07,-52.8)
  Bottom Layer w0.5: C16.1 R18.2 -48.021,-63.86 -47.921,-63.76 ; K2.1@-47.921,-66.76 -47.921,-63.76 ; K2.1@-47.921,-62.26 -47.921,-63.76
USBVCC: D4.1 J7.1 Q3.3 U3.31 | length 48.7
  Top Layer w0.3: J7.1 -51.4,-33 -49.9,-31.5 v1(-48.573,-31.5) ; v1(-48.573,-36.045) -41.845,-36.045 -40.515,-34.715 U3.31
  Top Layer w0.5: v1(-25.903,-28.933) Q3.3
  Bottom Layer w0.5: v1(-48.573,-36.045) v1(-48.573,-31.5) ; D4.1 v1(-48.573,-31.5) ; v1(-25.903,-28.933) -26.37,-29.4 -48,-29.4 -48.573,-29.973 v1(-48.573,-31.5)
VMOT_24V: C3.2 D2.2 J1.1 R2.2 U2.5 | length 59.1
  Top Layer w0.5: D2.2@-32.5,-9.63 U2.5
  Top Layer w0.75: R2.2 -35.922,-16.089 -33.34,-13.506 D2.2
  Top Layer w2.54: D2.2@-32.5,-8.69 v1(-32.5,-6.5) -32.5,-4.402 -30.798,-2.7 -16,-2.7 -14.5,-4.2 -14.5,-14.3 -13.12,-15.68 J1.1
  Bottom Layer w1: C3.2@-32.5,-9.385 v1(-32.5,-6.5)
pads on no net: J7.4 J8.0 J8.2 J8.4 J8.5 J8.6 J8.9 U1.7 U2.4 U3.5 U3.6 U3.7 U3.10 U3.11 U3.12 U3.13 U3.14 U3.18 U3.19 U3.20 U3.21 U3.22 U3.23 U3.25 U3.26 U4.11 U4.13 U5.19 U5.22 Y1. Y2.

## Polygon pours and split planes (outlines as drawn)
GND on Top Layer "Top-No Net" (hatched 90Degree grid 0.508 track 0.6, remove dead copper, pour order 4): -57.7,0.8 3.7,0.8 3.7,-110.3 4.2,-110.8 -58,-110.8 -58,0.5 -57.8,0.7
GND on Bottom Layer "Top-No Net" (hatched 90Degree grid 0.508 track 0.6, remove dead copper, pour order 6): -57.9,0.5 3.7,0.5 3.7,-110.8 3.6,-110.9 -58,-110.9 -58,0.4 -57.9,0.5

## Keep-outs
Keep-Out Layer:
  the board outline again, w0.254

## Other copper
Top Layer:
  rectangle net NetD2_1: -46.3,-12.6 -36.5,-7.73

## Silkscreen, mask and mechanical layers (free items; w line width, h text height)
Top Overlay:
  text "VIN" at -43.382,-8.6 h1
  text "GND" at -15.002,-11.2 h1
  text "+24V" at -16.018,-16.2 h1
  text "GND" at -43.102,-17.9 h1
  text "EN-" at -12.779,-23.18 h1
  text "EN+" at -12.87,-28.7 h1
  text "DR-" at -12.779,-33.38 h1
  text "DR+" at -12.8,-38.682 h1
  text "RESET" at -54.722,-40.1 h1
  text "PU-" at -12.79,-43.5 h1
  text "PU+" at -12.79,-49.094 h1
  text "GND" at -12.97,-58.1 h1
  text "+5V" at -12.97,-63.1 h1
  text "EB-" at -12.97,-67.8 h1
  text "STAT/STOP" at -55.4,-68.7 h1 r90
  text "Inc" at -55.5,-72.6 h1 r90
  text "EB+" at -12.901,-72.7 h1
  text "EA-" at -13.001,-77.29 h1
  text "Dec" at -55.4,-79.7 h1 r90
  text "EA+" at -12.9,-82.878 h1
  text "Right" at -55.5,-87.5 h1 r90
  text "Stepper Controller" at -42.198,-89.268 h2 r90
  text "Left" at -55.476,-94.2 h1 r90
  text "Limit2" at -26.853,-94.8 h1
  text "Limit1" at -40,-94.85 h1
  text "Free" at -55.5,-101.3 h1 r90
  text "Absolute Encoder" at -17.542,-103.6 h1

## Dimensions
0,-110 to 0,0 on Top Overlay
-57,-107 to 3,-107 on Top Overlay